# Altium PCB clock_circuit.PcbDoc
Units mm, origin at the board's own origin, x right, y up, seen from the top; angles counter-clockwise.
Board outline 152.4 x 101.6 mm, 2 copper layers (Top Layer, Bottom Layer); 29 components, 52 nets, 187 pads, 0 vias.
Unrouted connection lines stored in the file: 110.
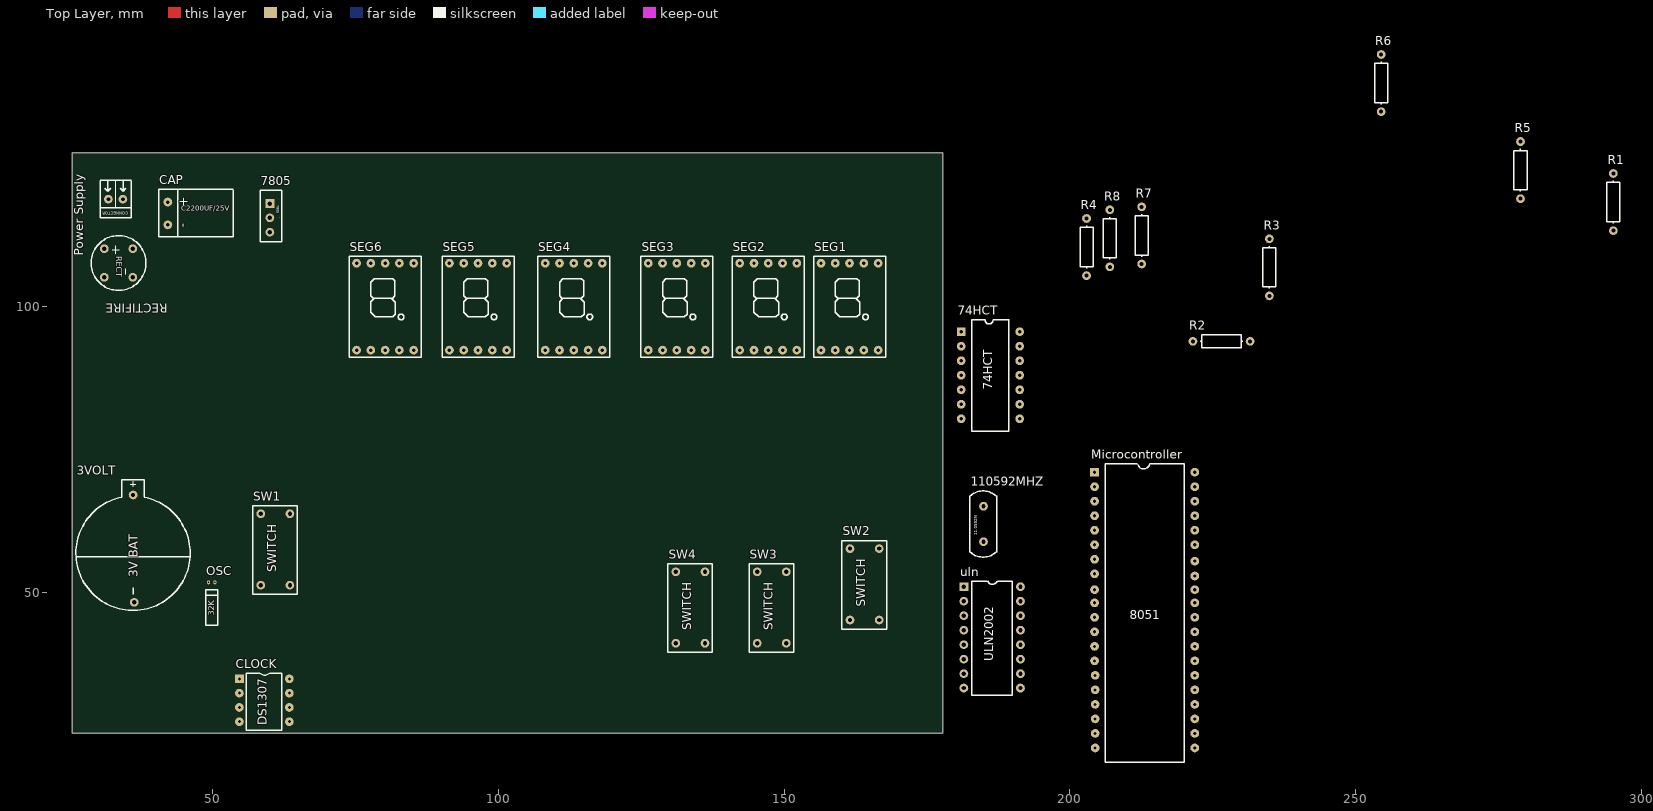
[diagram p0: Top Layer view]
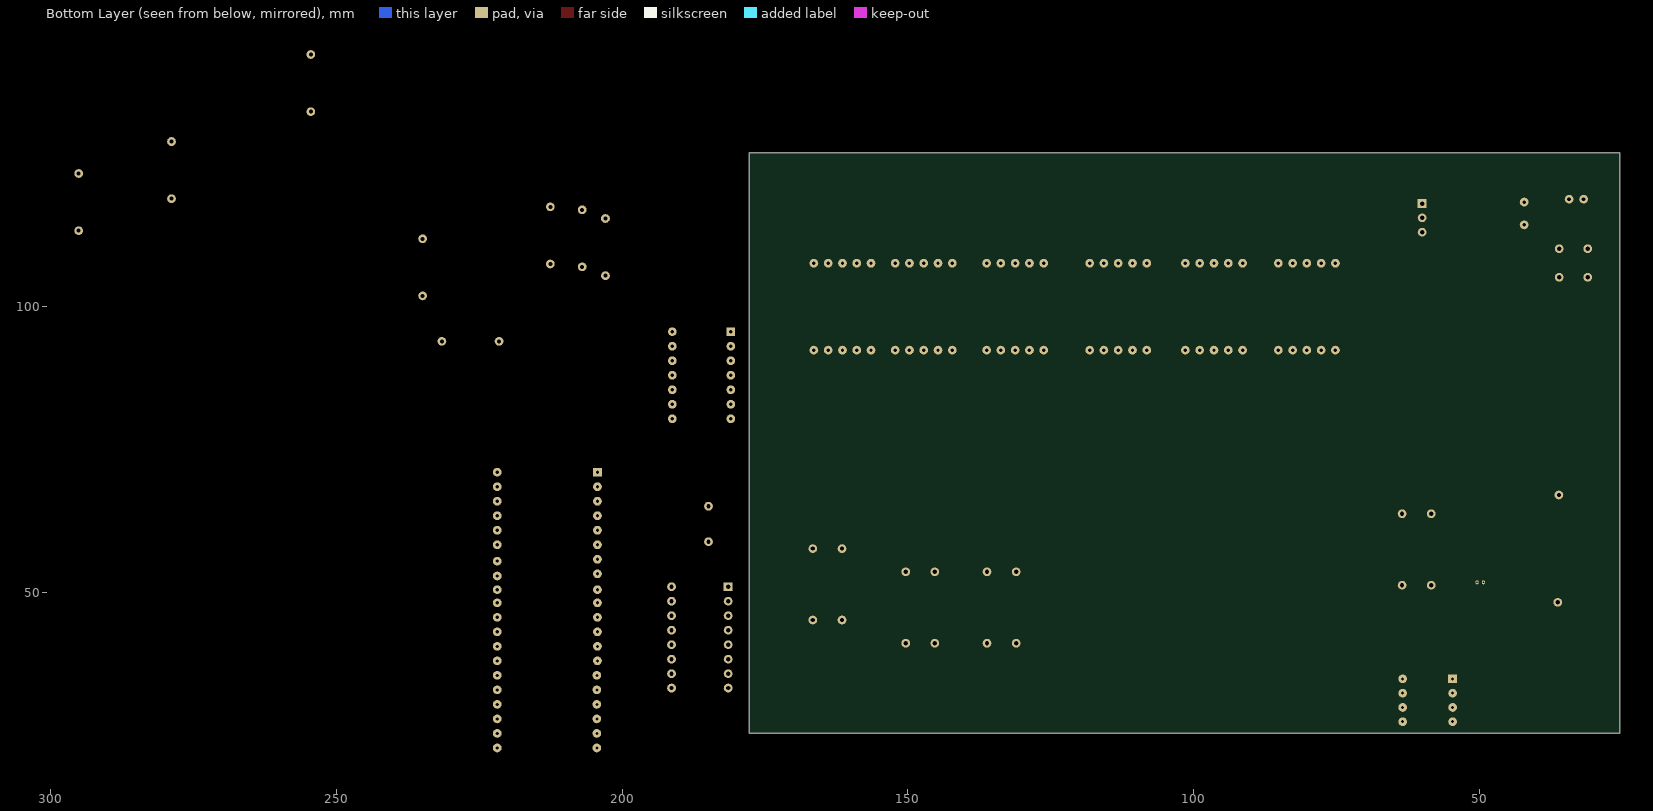
[diagram p1: Bottom Layer view, seen from below]

## Layer stack, top to bottom
Top Layer: signal copper 0.0356
Dielectric: dielectric 0.32, FR-4, Dk 4.8
Bottom Layer: signal copper 0.0356

## Board outline
25.4,25.4 177.8,25.4 177.8,127 25.4,127

## Design rules (kind name [scope] priority, off if disabled: settings)
Clearance [All] p1: gap=0.254
PolygonConnect [All] p1: connectstyle=Relief reliefconductorwidth=0.254 reliefentries=4 polygonreliefangle="90 Angle"
RoomDefinition Sheet_clock_circuite [InComponentClass('Sheet_clock_circuite')] p1: confinementstyle=ConfineIn formatcopy=TRUE lockcomponents=FALSE outline 0,0 50.8,0 50.8,25.4 0,25.4
RoutingVias [All] p1: holewidth=0.711 width=1.27 viastyle="Through Hole" minholewidth=0.711 minwidth=1.27 maxholewidth=0.711 maxwidth=1.27
SilkscreenOverComponentPads [All] p1: minsilkscreentomaskgap=0.254
SolderMaskExpansion [All] p1: expansion=0.102
TestPointUsage [All] p1: valid=0 allowmultiple=FALSE
Testpoint [All] p1: side=15 testpointundercomponent=TRUE minsize=1.016 maxsize=2.54 preferedsize=1.524 minholesize=0 maxholesize=1.016 preferedholesize=0.813 testpointgrid=0.025 style=1023 order=0123456789
Width [All] p1: maxlimit=0.254 minlimit=0.254 preferedwidth=0.254
23 further rules are at their usual default settings.

## Components (designator, comment, footprint, x,y, rotation, side; value= is the part's Value field where it differs from the comment)
3VOLT "Battery_3V" "3V BAT" 36.068,56.896 r0 top
74HCT "74_HCT" 74HCT 182.88,78.232 r0 top
7805 "LM7805" L7805 58.42,120.396 r270 top
110592MHZ "XTAL_8051" osc_12 184.912,58.928 r90 top
CAP "CF2200UF" CAP2200UF 42.164,118.364 r270 top
CLOCK "DS1307_RTC" DS1307 55.88,25.908 r0 top
Microcontroller "8051" NUV_8051 206.248,20.32 r0 top
OSC "OSCILLATOR" OSC_32K 50.292,51.816 r90 top
"Power Supply" "AC SUPPLY" CONNECTOR 33.02,118.872 r180 top
R1 "RES330" RES 295.148,118.364 r90 top
R2 "RES330" RES 226.568,93.98 r180 top
R3 "RES330" RES 234.95,106.934 r90 top
R4 "RES330" RES 202.946,110.49 r90 top
R5 "RES330" RES 278.892,123.952 r90 top
R6 "RES330" RES 254.508,139.192 r90 top
R7 "RES330" RES 212.598,112.522 r90 top
R8 "RES330" RES 207.01,112.014 r90 top
RECTIFIRE "Rectifire" RECT 33.528,107.696 r270 top
SEG1 "7SEGMENT" LED_Display 156.464,92.456 r0 top
SEG2 "7SEGMENT" LED_Display 142.24,92.456 r0 top
SEG3 "7SEGMENT" LED_Display 126.238,92.456 r0 top
SEG4 "7SEGMENT" LED_Display 108.204,92.456 r0 top
SEG5 "7SEGMENT" LED_Display 91.44,92.456 r0 top
SEG6 "7SEGMENT" LED_Display 75.184,92.456 r0 top
SW1 "SWITCH" SWITCH 58.42,51.308 r90 top
SW2 "SWITCH" SWITCH 161.544,45.212 r90 top
SW3 "SWITCH" SWITCH 145.288,41.148 r90 top
SW4 "SWITCH" SWITCH 131.064,41.148 r90 top
uln "ULN2002" ULN2002 182.88,32.004 r0 top

## Footprints (in the part's own frame and the unit in brackets; to place one, negate y for a bottom-side part, rotate by r counter-clockwise, add the part's x,y. Pads: shape width x height; smd on the part's side, far side on the other; paste and mask are expansions set on the pad)
"3V BAT" [mil]
  round 60 hole 30: 0(0,401.57) 1(7.87,-338.58)
  silkscreen extent -394,-394 394,508
74HCT [mm]
  rect 1.524x1.524 hole 0.652: 1(-1.88,17.44)
  round 1.524 hole 0.65: 2(-1.88,14.9) 3(-1.88,12.36) 4(-1.88,9.82) 5(-1.88,7.28) 6(-1.88,4.74) 7(-1.88,2.2) 8(8.36,2.2) 9(8.36,4.74) 10(8.36,7.28) 11(8.36,9.82) 12(8.36,12.36) 13(8.36,14.9) 14(8.366,17.44)
  silkscreen extent 0,0 6.5,19.5
CAP2200UF [mil]
  round 60 hole 24.41: 0(0,0) 1(157.48,0)
  silkscreen extent -87,-63 240,449
CONNECTOR [mil]
  round 60 hole 25.67: 0(-50,0) 1(50,0)
  silkscreen extent -108,-130 107,130
DS1307 [mm]
  rect 1.524x1.524 hole 0.52: 1(-1.2,9)
  round 1.524 hole 0.52: 2(-1.2,6.5) 3(-1.2,4) 4(-1.2,1.5) 5(7.54,1.5) 6(7.54,4) 7(7.54,6.5) 8(7.54,9)
  silkscreen extent 0,0 6.25,10
L7805 [mil]
  rect 60x60 hole 30: 1(90.55,62.99)
  round 60 hole 30: 2(188.98,62.99) 3(287.4,62.99)
  silkscreen extent 0,-4 354,146
LED_Display [mm]
  round 1.524 hole 0.6: 1(0,0) 2(2.5,0) 3(5,0) 4(7.5,0) 5(10,0) 6(10,15.2) 7(7.5,15.2) 8(5,15.2) 9(2.5,15.2) 10(0,15.2)
  silkscreen extent -1.3,-1.3 11.3,16.4
NUV_8051 [mm]
  rect 1.524x1.524 hole 0.562: 1(-1.9,50.76)
  round 1.524 hole 0.562: 2(-1.9,48.22) 3(-1.9,45.68) 4(-1.9,43.14) 5(-1.9,40.6) 6(-1.9,38.06) 7(-1.9,35.52) 8(-1.9,32.98) 9(-1.9,30.2) 10(-1.9,27.9) 11(-1.9,25.36) 12(-1.9,22.82) 13(-1.9,20.28) 14(-1.9,17.74) 15(-1.8,15.2) 16(-1.8,12.66) 17(-1.8,10.12) 18(-1.8,7.58) 19(-1.8,5.04) 20(-1.8,2.5) 21(15.64,2.5) 22(15.64,5.04) 23(15.64,7.58) 24(15.64,10.12) 25(15.64,12.66) 26(15.64,15.2) 27(15.64,17.74) 28(15.64,20.28) 29(15.64,22.82) 30(15.64,25.36) 31(15.64,27.9) 32(15.64,30.2) 33(15.64,32.6) 34(15.64,35.2) 35(15.64,38.06) 36(15.64,40.6) 37(15.64,43.14) 38(15.64,45.68) 39(15.64,48.22) 40(15.64,50.76)
  silkscreen extent 0,0 13.84,52.21
osc_12 [mil]
  round 60 hole 30: 0(0,0) 1(244.09,0)
  silkscreen extent -107,-90 350,95
OSC_32K [mm]
  oval 0.7x0.5 hole 0.32: 0(0,1) 1(0,-0.1)
  silkscreen extent -7.5,-0.6 -1.3,1.5
RECT [mm]
  round 1.524 hole 0.75: 0(-2.5,-2.5) 1(2.5,2.5) 2(2.5,-2.5)
  round 1.524 hole 0.752: 3(-2.5,2.5)
  silkscreen extent -4.8,-4.8 4.8,4.8
RES [mm]
  round 1.524 hole 0.7: 0(-5,0) 1(5,0)
  silkscreen extent -3.7,-1.14 3.7,1.14
SWITCH [mil]
  round 60 hole 29.61: 0(0,0) 1(492.13,0) 2(0,-200.79) 3(492.13,-200.79)
  silkscreen extent -63,-252 547,55
ULN2002 [mil]
  rect 60x60 hole 30: 1(-55.12,750)
  round 60 hole 30: 2(-55.12,650) 3(-55.12,550) 4(-55.12,450) 5(-55.12,350.39) 6(-55.12,250) 7(-55.12,150) 8(-55.12,51.18) 9(334.65,51.18) 10(334.65,150) 11(334.65,250) 12(334.65,350.39) 13(334.65,450) 14(334.65,550) 15(334.65,650) 16(334.65,750)
  silkscreen extent 0,0 280,787

## Part data
SEG1 SEG2 SEG3 SEG4 SEG5 SEG6: library part 7-SEGMENTS

## Nets (pads, with @x,y where several pads share a name; then routed paths per layer and width w, separated by ;. In a path a pad name is that pad's centre, name@x,y a point inside that pad or via, vN(x,y) a via of type N, cw(c..) or ccw(c..) an arc to the next point about the centre after c; other vN are vias at no path point)
A_0: R1.1
B_1: R2.1 SEG1.1 SEG2.1 SEG3.1 SEG4.1 SEG5.1 SEG6.1
C_2: R3.1 SEG1.2 SEG2.2 SEG3.2 SEG4.2 SEG5.2 SEG6.2
CLK_SCL: CLOCK.6 Microcontroller.14
CLK_SDA: CLOCK.5 Microcontroller.15
D_3: R4.1 SEG1.3 SEG2.3 SEG3.3 SEG4.3 SEG5.3 SEG6.3
DP_7: R8.1 SEG1.7 SEG2.7 SEG3.7 SEG4.7 SEG5.7 SEG6.7
E_4: R5.1 SEG1.4 SEG2.4 SEG3.4 SEG4.4 SEG5.4 SEG6.4
F_5: R6.1 SEG1.5 SEG2.5 SEG3.5 SEG4.5 SEG5.5 SEG6.5
G_6: R7.1 SEG1.6 SEG2.6 SEG3.6 SEG4.6 SEG5.6 SEG6.6
GND: 3VOLT.1 74HCT.1 74HCT.10 7805.2 CAP.1 CLOCK.4 Microcontroller.20 RECTIFIRE.1 SW1.0 SW1.1 SW2.0 SW2.1 SW3.0 SW3.1 SW4.0 SW4.1 uln.8
HCT_A: R1.0
HCT_B: R2.0
HCT_C: R3.0
HCT_D: R4.0
HCT_DP: 74HCT.12 R8.0
HCT_E: R5.0
HCT_F: 74HCT.14 R6.0
HCT_G: 74HCT.13 R7.0
Net3VOLT_0: 3VOLT.0 CLOCK.3
Net7805_1: 7805.1 CAP.0 RECTIFIRE.0
Net110592MHZ_0: 110592MHZ.0 Microcontroller.19
Net110592MHZ_1: 110592MHZ.1 Microcontroller.18
NetCLOCK_1: CLOCK.1 OSC.1
NetCLOCK_2: CLOCK.2 OSC.0
"NetPower Supply_0": "Power Supply.0" RECTIFIRE.3
"NetPower Supply_1": "Power Supply.1" RECTIFIRE.2
PD0: 74HCT.2 Microcontroller.39
PD1: 74HCT.3 Microcontroller.38
PD2: 74HCT.4 Microcontroller.37
PD3: 74HCT.5 Microcontroller.36
PD4: 74HCT.6 Microcontroller.35
PD5: 74HCT.7 Microcontroller.34
PD6: 74HCT.8 Microcontroller.33
PD7: 74HCT.9 Microcontroller.32
SEG1_ULN: SEG1.8 SEG1.9 uln.15
SEG2_ULN: SEG2.8 SEG2.9 uln.14
SEG3_ULN: SEG3.8 SEG3.9 uln.13
SEG4_ULN: SEG4.8 SEG4.9 uln.12
SEG5_ULN: SEG5.8 SEG5.9 uln.11
SEG6_ULN: SEG6.8 SEG6.9 uln.10
SW_1: Microcontroller.1 SW1.2 SW1.3
SW_2: Microcontroller.2 SW2.2 SW2.3
SW_3: Microcontroller.3 SW3.2 SW3.3
SW_4: Microcontroller.4 SW4.2 SW4.3
ULN_1: Microcontroller.26 uln.2
ULN_2: Microcontroller.25 uln.3
ULN_3: Microcontroller.24 uln.4
ULN_4: Microcontroller.23 uln.5
ULN_5: Microcontroller.22 uln.6
ULN_6: Microcontroller.21 uln.7
VCC: 74HCT.11 7805.3 CLOCK.8 Microcontroller.40 uln.9
pads on no net: CLOCK.7 Microcontroller.5 Microcontroller.6 Microcontroller.7 Microcontroller.8 Microcontroller.9 Microcontroller.10 Microcontroller.11 Microcontroller.12 Microcontroller.13 Microcontroller.16 Microcontroller.17 Microcontroller.27 Microcontroller.28 Microcontroller.29 Microcontroller.30 Microcontroller.31 SEG1.10 SEG2.10 SEG3.10 SEG4.10 SEG5.10 SEG6.10 uln.1 uln.16

## Text inside footprints (layer, text, board x,y; h text height)
3VOLT: Top Overlay "3V BAT" at 36.868,52.696 h1.52 r90
110592MHZ: Top Overlay "11.0592M" at 183.812,60.028 h0.5 r90
CAP: Top Overlay "-" at 44.264,114.664 h1.52 r270; Top Overlay "+" at 44.264,119.264 h1.52 r270; Top Overlay "C2200UF/25V" at 44.464,116.464 h1.52
CLOCK: Top Overlay "DS1307" at 59.48,26.808 h1.52 r90
OSC: Top Overlay "32K" at 50.292,45.916 h1.02 r90
"Power Supply": Top Overlay "CONNECTOR" at 35.22,116.672 h0.5 r180
RECTIFIRE: Top Overlay "RECT" at 33.128,108.896 h1.02 r270